# EAGLE board AdaptSensor (EAGLE 9.5.2)
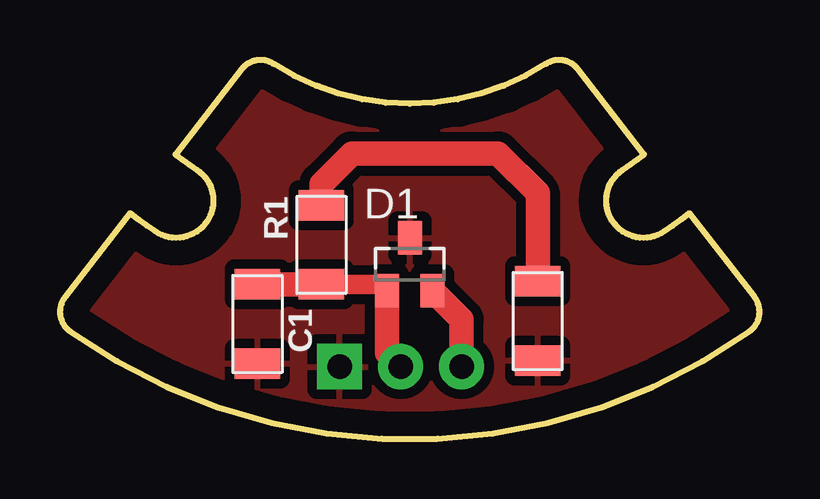
[diagram p0: board, top side]
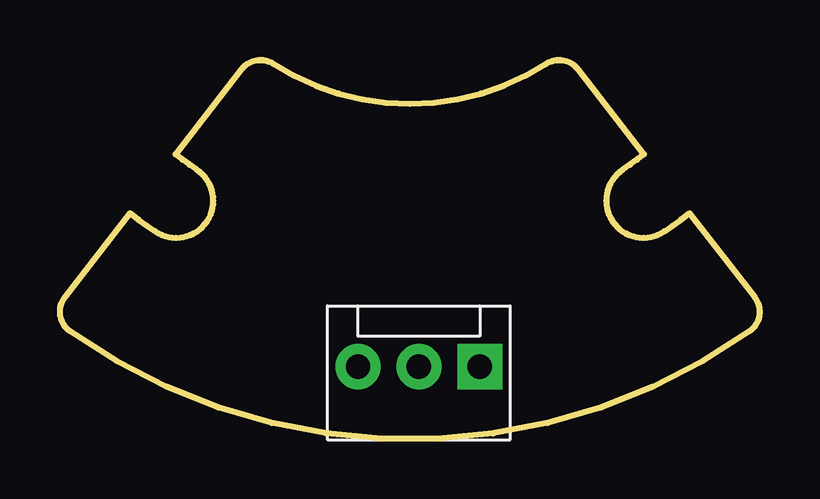
[diagram p1: board, bottom side, seen from below]

Size 29.17 x 15.8 mm. Coordinates in mm from the lower left corner, seen from the top.
Outline: 2.92,9.41 0.21,5.91 arc92 0.42,4.48 arc71 28.75,4.48 arc92 28.96,5.91 26.25,9.41 arc-4 25.19,8.65 arc-180 23.46,11.22 arc4 24.35,11.86 21.6,15.41 arc85 20.27,15.64 arc-66 8.9,15.64 arc85 7.57,15.41 4.82,11.86 arc4 5.71,11.22 arc-180 3.98,8.65 arc-4 2.92,9.41
Copper layers (1*16): Top 0.035mm / dielectric 1.5mm / Bottom 0.035mm
Design rules "default *": minimum track width 6mil, minimum drill 0.35mm, track to track 16mil, track to pad 16mil, pad to pad 16mil, via to via 16mil, smd to smd 6mil, copper to edge 40mil, drill to drill 6mil, minimum pad ring 10mil, minimum via ring 8mil, stop-mask expansion 4mil, vias tented up to drill 0mil, thermal gap 16mil

## Footprints (pad centres in the part's own frame; a part is rotated, then mirrored left to right if it is on the bottom)
C1206FAB = smd 1.27 x 1.905: 1 -1.651,0; 2 1.651,0
SOT190P290X100-3N = smd 1 x 1.4: 1 -0.95,0.21; 2 0.95,0.21; 3 0,2.412
MOLEX-1X3 = drill 1.016 pad 1.88 square: 1 0,0 | drill 1.016 pad 1.88: 2 2.54,0; 3 5.08,0
R1206FAB = smd 1.27 x 1.905: 1 -1.651,0; 2 1.651,0
LED1206FAB = smd 1.27 x 1.905: 1 -1.651,0; 2 1.651,0

## Placement (x,y rotation side)
C1  0,1uF  [C1206FAB]  8.23,4.79 270 top
D1  A1324LLHLT-T  [SOT190P290X100-3N]  14.58,5.97 0 top
J1  [MOLEX-1X3]  11.66,3.01 180 bottom
R1  [R1206FAB]  10.9,8.09 270 top
U$1  LEDFAB1206  [LED1206FAB]  19.92,4.91 270 top

## Library data of the parts
C1 R1 U$1 = fab
D1 = A1324LLHLT-T; AVAILABILITY: Unavailable; DESCRIPTION: Hall Effect Sensor Single Axis SOT-23W; MF: Allegro; MP: A1324LLHLT-T; PACKAGE: SOT-23-3 Allegro Microsystems LLC; PRICE: None
J1 = CONNECTORS; PROD_ID: CONN-08625; SF_ID: PRT-08096

## Nets
+5V: C1.1 D1.1 J1.2 R1.2
CAPT: D1.2 J1.3
GND: C1.2 D1.3 J1.1 U$1.2
N$1: R1.1 U$1.1

## Tracks (layer width: path | path; a pad name or v marks a point on that pad's centre or on a via)
+5V
  Top 0.813: R1.2 13.38,6.44 D1.1
  Top 1.016: J1.2 13.63,3.58 D1.1 | C1.1 R1.2
CAPT
  Top 1.016: J1.3 16.74,4.97 D1.2
GND
  pour Top: -0.66,5.42 8.23,16.85 20.93,16.85 29.82,5.42 26.01,-0.93 5.69,-0.93
N$1
  Top 1.016: R1.1 10.9,10.63 12.17,11.9 18.27,11.9 19.92,10.25 U$1.1